# Altium PCB 主控转接板-V1.0.PcbDoc
Units mil, origin at the board's own origin, x right, y up, seen from the top; angles counter-clockwise.
Board outline 2559.06 x 1181.1 mil, 2 copper layers (Top Layer, Bottom Layer); 32 components, 18 nets, 128 pads, 52 vias.
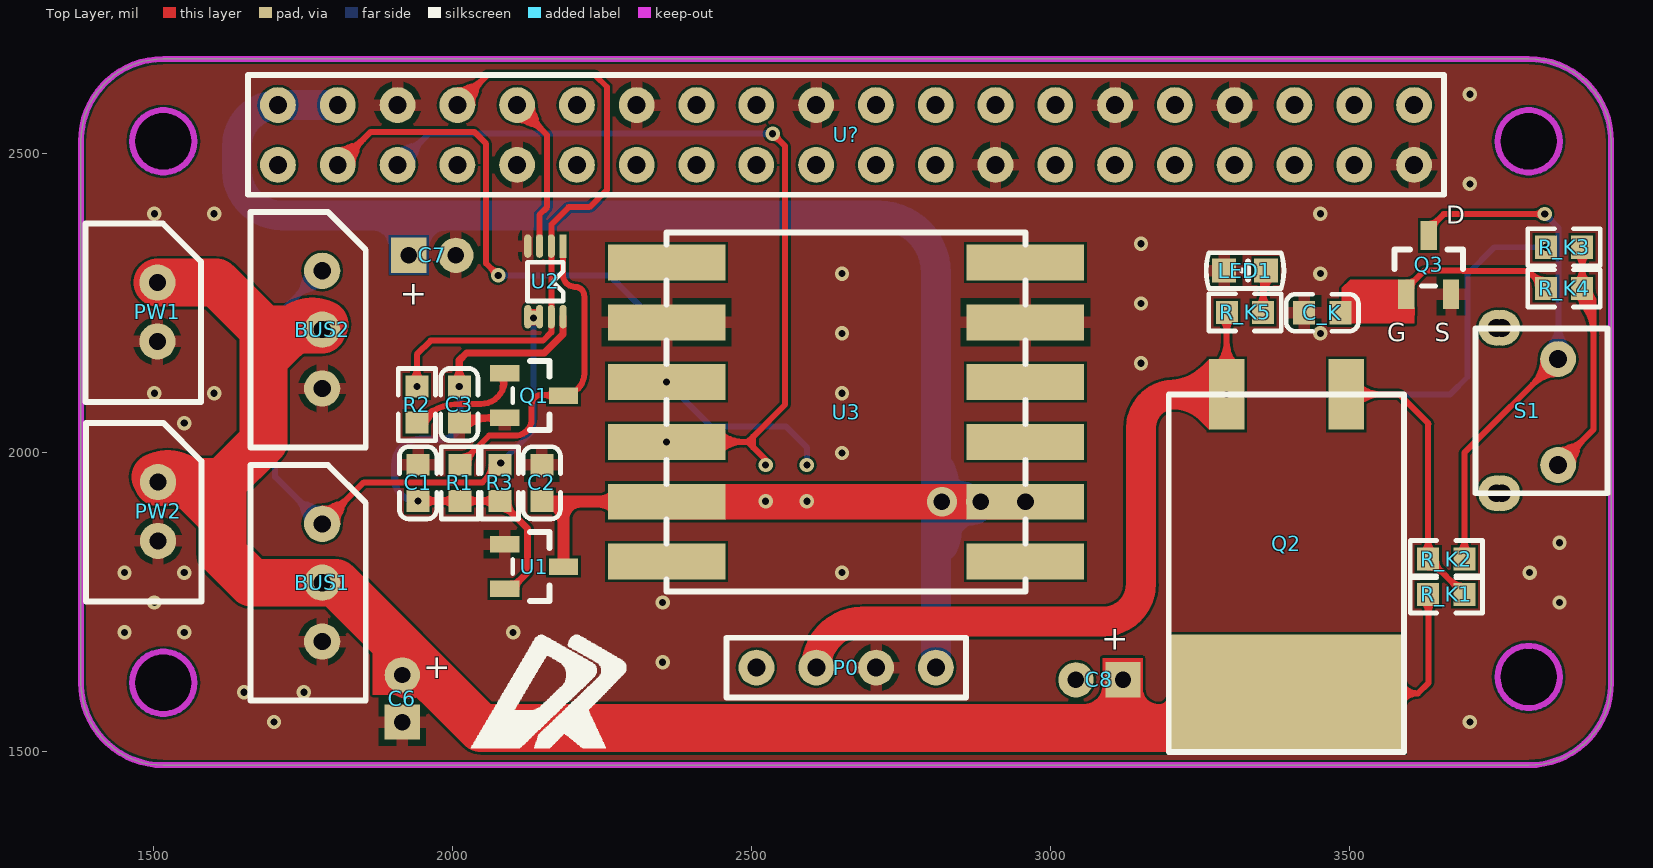
[diagram p0: Top Layer view]
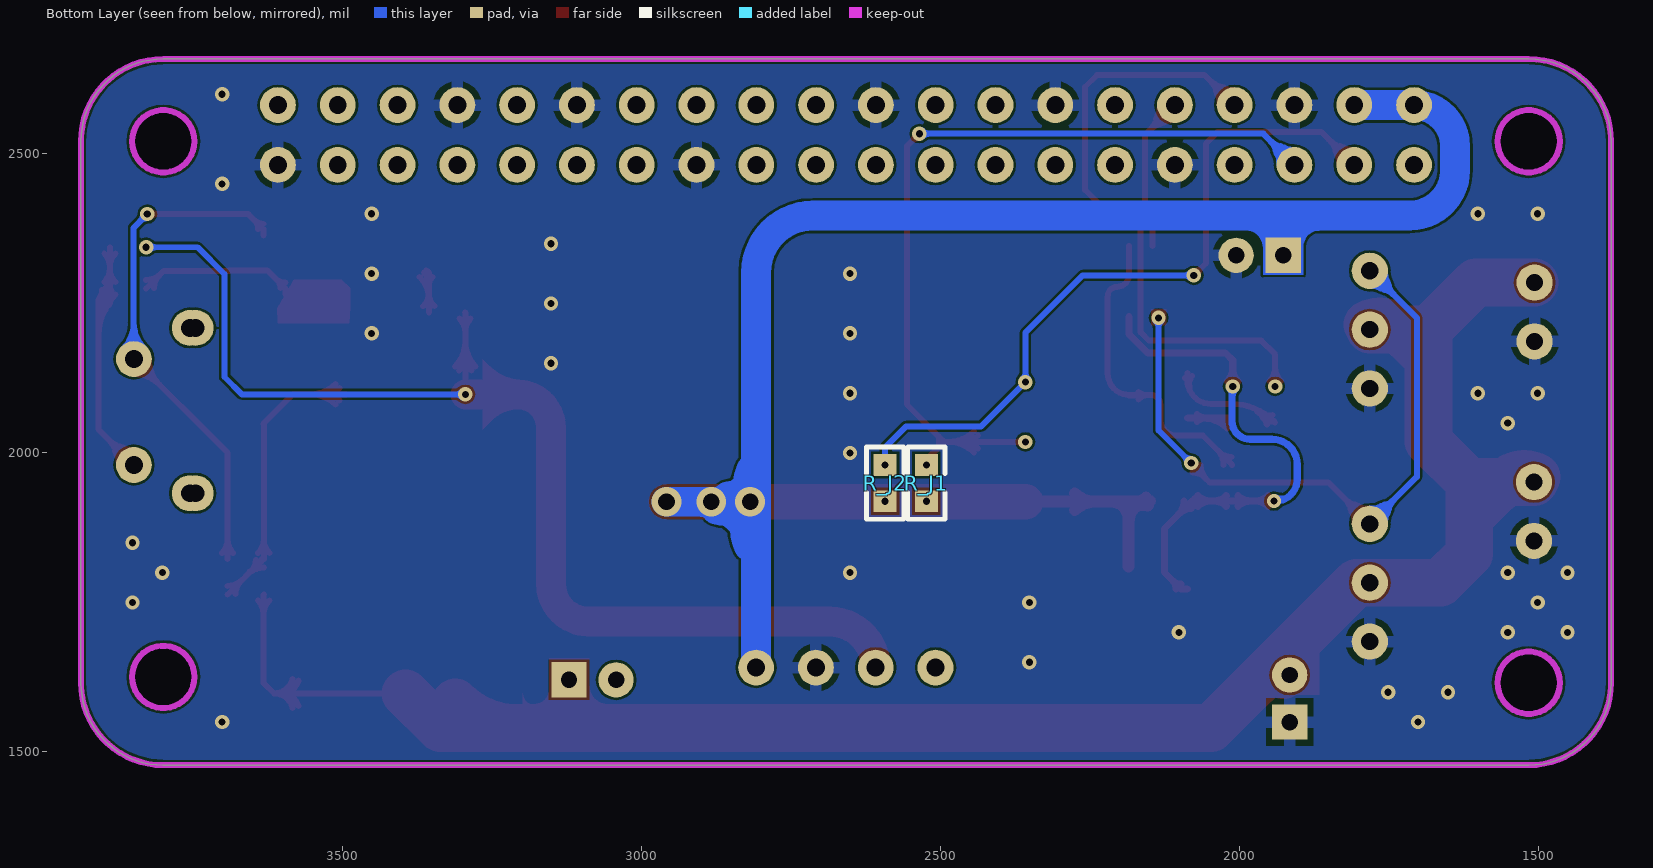
[diagram p1: Bottom Layer view, seen from below]
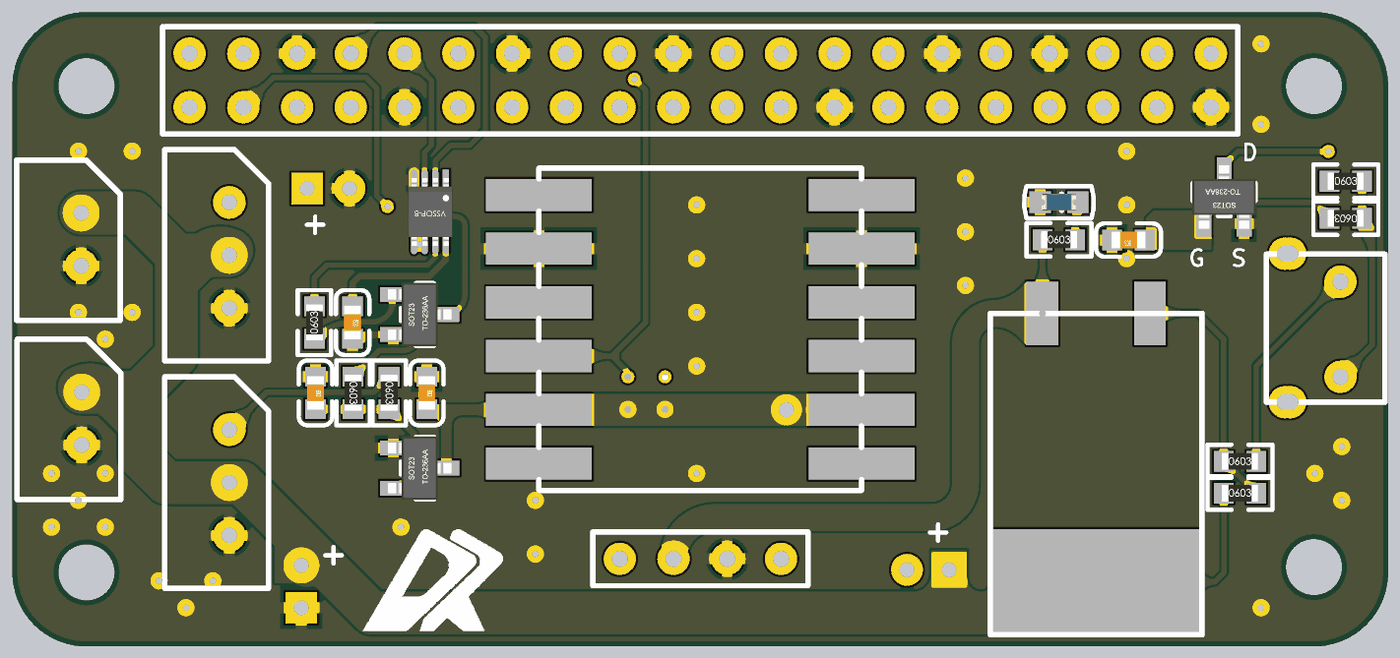
[diagram p2: 3D render of the assembled board from above, using the file's embedded part models]

## Layer stack, top to bottom
Top Solder: solder mask 0.4, Solder Resist, Dk 3.5
Top Layer: signal copper 1.4
Dielectric 1: dielectric 12.6, FR-4, Dk 4.8
Bottom Layer: signal copper 1.4
Bottom Solder: solder mask 0.4, Solder Resist, Dk 3.5

## Board outline
1377.95,1614.17 1377.95,2519.69 1377.95,2519.68 cw(c1515.75,2519.68) 1515.75,2657.48 3799.21,2657.48 cw(c3799.21,2519.68) 3937.01,2519.68 3937.01,1614.17 cw(c3799.21,1614.17) 3799.21,1476.38 1515.75,1476.38 cw(c1515.75,1614.17)
cut-out: 3747.05,2519.68 ccw(c3799.21,2519.68) 3799.21,2467.52 ccw(c3799.21,2519.68) 3851.38,2519.68 ccw(c3799.21,2519.68) 3799.21,2571.85 ccw(c3799.21,2519.68)
cut-out: 3747.05,1624.02 ccw(c3799.21,1624.02) 3799.21,1571.85 ccw(c3799.21,1624.02) 3851.38,1624.02 ccw(c3799.21,1624.02) 3799.21,1676.18 ccw(c3799.21,1624.02)
cut-out: 1515.75,1562.01 cw(c1515.75,1614.17) 1463.58,1614.17 cw(c1515.75,1614.17) 1515.75,1666.34 cw(c1515.75,1614.17) 1567.91,1614.17 cw(c1515.75,1614.17)
cut-out: 1515.75,2467.52 cw(c1515.75,2519.68) 1463.58,2519.68 cw(c1515.75,2519.68) 1515.75,2571.85 cw(c1515.75,2519.68) 1567.91,2519.68 cw(c1515.75,2519.68)

## Design rules (kind name [scope] priority, off if disabled: settings)
Clearance [All] p1: gap=4
HoleToHoleClearance [All] p1: gap=4 allowstackedmicrovias=TRUE
MinimumSolderMaskSliver [All] p1: minsoldermaskwidth=4
PolygonConnect PolygonConnect_1 [isvia] p1: connectstyle=Direct reliefconductorwidth=10 reliefentries=4 polygonreliefangle="90 Angle" airgapwidth=10
PolygonConnect [All] p2: connectstyle=Relief reliefconductorwidth=20 reliefentries=4 polygonreliefangle="90 Angle" airgapwidth=10
RoutingVias [All] p1: holewidth=28 width=50 viastyle="Through Hole" minholewidth=28 minwidth=50 maxholewidth=28 maxwidth=50
SilkToSilkClearance [All] p1: silktosilkclearance=0
SilkToSolderMaskClearance [IsPad] p1: minsilkscreentomaskgap=0 clearancetoexposedcopper=TRUE
SolderMaskExpansion [All] p1: expansion=4
Width [All] p1: maxlimit=100 minlimit=10 preferedwidth=50 minimp=50.000000 maximp=50.000000 favimp=50.000000
25 further rules are at their usual default settings.

## Classes and differential pairs
component class 主控转接板-V1.0: BUS1 BUS2 C1 C2 C3 C_K LED1 P0 PW1 PW2 Q1 Q2 Q3 R1 R2 R3 R_J1 R_J2 R_K1 R_K2 R_K3 R_K4 R_K5 S1 U1 U2 U3 U?

## Components (designator, comment, footprint, x,y, rotation, side; value= is the part's Value field where it differs from the comment)
BUS1 "Header 3" 3P 1781.5,1879.92 r270 top
BUS2 "Header 3" 3P 1781.5,2303.15 r270 top
C1 "C0603" Cap_0603 1941.79,1948.43 r270 top
C2 "C0603" Cap_0603 2148.79,1948.43 r270 top
C3 "C0603" Cap_0603 2010.79,2079.43 r270 top
C6 "Comment" "EC 5x11x2mm" 1915.43,1587.76 r90 top
C7 "Comment" "EC 5x11x2mm" 1965.63,2329 r0 top
C8 "Comment" "EC 5x11x2mm" 3081.37,1619 r180 top
C_K "4.7uF" Cap_0603 3454,2233 r180 top
LED1 "LED" LED_0603 3324.79,2303.43 r180 top
P0 "Header 4" MP2315GJ 2507.79,1639.43 r90 top
PW1 "Header_1X2" 2P 1505.91,2283.46 r270 top
PW2 "Header_1X2" 2P 1506.89,1949.8 r270 top
Q1 "S8050" LC-SOT-23(SOT-23-3) 2135.79,2094.43 r180 top
Q2 "IRF9540" SOT-263 3494.09,2096.46 r180 top
Q3 "2N7002" LC-SOT-23(SOT-23-3) 3631.89,2312.99 r270 top
R1 "0603" Res_0603 2011.79,1948.43 r270 top
R2 "0603" Res_0603 1939.79,2079.43 r90 top
R3 "0603" Res_0603 2078.79,1948.43 r270 top
R_J1 "1K" Res_0603 2523,1948 r90 bottom
R_J2 "1K" Res_0603 2592,1948 r90 bottom
R_K1 "51K" Res_0603 3661.42,1761.81 r0 top
R_K2 "" Res_0603 3661.42,1820.87 r0 top
R_K3 "510K" Res_0603 3858.27,2342.52 r0 top
R_K4 "510K" Res_0603 3858.27,2273.62 r180 top
R_K5 "1K" Res_0603 3324.79,2233.43 r0 top
S1 "SW-PB" "Touch Switch" 3848.43,2155.51 r270 top
U1 "XC6206P332MR (662K)" LC-SOT-23(SOT-23-3) 2135.79,1808.43 r180 top
U2 "SN74LVC2G126" VSSOP-8 2154.79,2285.43 r270 top
U3 "JY901" JY901 2957.48,1816.93 r180 top
U? "Raspberry Pi Zero W" "2.54 2*20PIN" 1707.48,2480.31 r90 top
? "Comment" LOGO2 2030,1505.36 r0 top

## Footprints (in the part's own frame and the unit in brackets; to place one, negate y for a bottom-side part, rotate by r counter-clockwise, add the part's x,y. Pads: shape width x height; smd on the part's side, far side on the other; paste and mask are expansions set on the pad)
"2.54 2*20PIN" [mil]
  round 60 hole 30: 1(0,0) 2(100,0) 3(0,-100) 4(100,-100) 5(0,-200) 6(100,-200) 7(0,-300) 8(100,-300) 9(0,-400) 10(100,-400) 11(0,-500) 12(100,-500) 13(0,-600) 14(100,-600) 15(0,-700) 16(100,-700) 17(0,-800) 18(100,-800) 19(0,-900) 20(100,-900) 21(0,-1000) 22(100,-1000) 23(0,-1100) 24(100,-1100) 25(0,-1200) 26(100,-1200) 27(0,-1300) 28(100,-1300) 29(0,-1400) 30(100,-1400) 31(0,-1500) 32(100,-1500) 33(0,-1600) 34(100,-1600) 35(0,-1700) 36(100,-1700) 37(0,-1800) 38(100,-1800) 39(0,-1900) 40(100,-1900)
  silkscreen extent -50,-1950 150,50
2P [mm]
  round 1.542 hole 0.73: 1(0,0) 2(2.5,0)
  silkscreen extent -2.5,-3.05 5.08,1.85
3P [mm]
  round 1.542 hole 0.73: 1(0,0) 2(2.5,0) 3(5,0)
  silkscreen extent -2.5,-3.05 7.5,1.85
Cap_0603 [mm]
  rect 0.93x0.98 smd: 1(-0.77,0) 2(0.77,0)
  silkscreen extent -1.53,-0.79 1.54,0.79, body extent -0.8,-0.4 0.8,0.4, height 0.3
"EC 5x11x2mm" [mm]
  rect 1.5x1.5 hole 0.7: 1(-1,0)
  round 1.5 hole 0.7: 2(1,0)
JY901 [mil]
  rect 196.85x60 smd: 1(0,0) 2(0,-100) 3(0,-200) 4(0,-300) 5(0,-400) 6(0,-500) 7(600,-500) 8(600,-400) 9(600,-300) 10(600,-200) 11(600,-100) 12(600,0)
  silkscreen extent 0,-550 600,50
LC-SOT-23(SOT-23-3) [mm]
  rect 1.25x0.7 smd: 1(1.25,-0.95) 2(1.25,0.95) 3(-1.25,0)
  silkscreen extent -0.65,-1.46 0.9,1.46, body extent -1.5,-1.5 1.5,1.5, height 1.3
LED_0603 [mil]
  rect 40x40 smd: A(-35,0) K(35,0)
  silkscreen extent -65,-30 65,30, body extent -32,-16 32,16, height 24
LOGO2 [mil]
  silkscreen extent 0,0 260,189
MP2315GJ [mil]
  round 60 hole 30: 1(0,-300) 2(0,-200) 3(0,-100) 4(0,0)
  silkscreen extent -50,-350 50,50
Res_0603 [mm]
  rect 0.93x0.98 smd: 1(-0.77,0) 2(0.77,0)
  silkscreen extent -1.53,-0.79 1.54,0.79, body extent -0.85,-0.4 0.85,0.4, height 0.56
SOT-263 [mm]
  rect 1.5x3 smd: 1(0,0) 3(5.08,0)
  rect 10x5 smd: 4(2.54,12.7)
  silkscreen extent -2.46,0 7.54,15.2
"Touch Switch" [mil]
  round 60 hole 30: 0(-52.17,-93.5) 0(-52.17,-103.35) 0(224.41,-103.35) 0(224.41,-93.5) 1(0,0) 2(177.17,0)
  silkscreen extent -51,-138 224,83
VSSOP-8 [mm]
  rect 1x0.3 smd: 1(-1.5,0.75)
  oval 1x0.3 smd: 2(-1.5,0.25) 3(-1.5,-0.25) 4(-1.5,-0.75) 5(1.5,-0.75) 6(1.5,-0.25) 7(1.5,0.25) 8(1.5,0.75)
  silkscreen extent -0.81,-0.76 0.84,0.76, body extent -1.6,-1.04 1.6,1.06, height 0.9

## Part data
BUS1 BUS2: "Header, 3-Pin"
C1 C2 C3: library part "Cap 1"
C_K: library part CAP_C, "Electrolytic Capacitor"
P0: "Header, 4-Pin"
Q1: library part NPN
Q2: library part MOSFET-P, "P-Channel MOSFET"
Q3: library part MOSFET-N, "N-Channel MOSFET"
R1 R2 R3: library part Res2
R_J1 R_J2 R_K1 R_K2 R_K3 R_K4 R_K5: library part RES, "Resistor"
S1: "Switch"

## Via types
v1: diameter 24, hole 12, Top Layer to Bottom Layer, 49 vias
v2: diameter 50, hole 28, Top Layer to Bottom Layer, 3 vias

## Nets (pads, with @x,y where several pads share a name; then routed paths per layer and width w, separated by ;. In a path a pad name is that pad's centre, name@x,y a point inside that pad or via, vN(x,y) a via of type N, cw(c..) or ccw(c..) an arc to the next point about the centre after c; other vN are vias at no path point)
3.3V: C1.2 C3.1 R1.2 R3.2 U1.2 U2.8 | length 1631.3
  Top Layer w12: v1(1941.79,1918.11) R1.2 R3.2 2124.79,1872.11 2124.79,1798.43 2097.39,1771.02 U1.2 ; v1(2010.79,2109.74) 2010.79,2153.43 2022.79,2165.43 2152.79,2165.43 2184.32,2196.95 U2.8 ; R3.2@2074.54,1913.87 ccw(c2064.3,1903.62) 2064.3,1918.11 ccw(c2064.3,1932.6) R3.2@2074.54,1922.35 ; R3.2@2079.77,1905.8 cw(c2079.77,1878.47) 2099.1,1897.8 ; R3.2@2092.08,1918.11 ccw(c2124.17,1918.11) 2101.48,1895.42 ; U1.2@2097.4,1778.8 ccw(c2097.4,1797.55) U1.2@2110.66,1784.29 ; U1.2@2105.18,1771.02 cw(c2124,1771.02) U1.2@2110.69,1784.33 ; C1.2@1956.27,1918.11 cw(c1956.27,1932.6) 1946.03,1922.35 ccw(c1956.27,1932.6) C1.2@1956.27,1918.11 ; C1.2@1956.27,1918.11 ccw(c1956.27,1903.62) 1946.03,1913.87 cw(c1956.27,1903.62) C1.2@1956.27,1918.11 ; 1972.48,1918.11 cw(c1972.48,1947.82) 1951.47,1926.81 ccw(c1972.48,1947.82) 1972.48,1918.11 ; 1972.48,1918.11 ccw(c1972.48,1888.4) 1951.47,1909.41 cw(c1972.48,1888.4) 1972.48,1918.11 ; 1981.09,1918.11 cw(c1981.09,1888.4) 2002.1,1909.41 ccw(c1981.09,1888.4) 1981.09,1918.11 ; 1981.09,1918.11 ccw(c1981.09,1947.82) 2002.1,1926.81 cw(c1981.09,1947.82) 1981.09,1918.11 ; C3.1@2010.79,2124.23 cw(c1996.3,2124.23) 2006.54,2113.98 ccw(c1996.3,2124.23) C3.1@2010.79,2124.23 ; C3.1@2010.79,2124.23 ccw(c2025.27,2124.23) 2015.03,2113.98 cw(c2025.27,2124.23) C3.1@2010.79,2124.23 ; 2010.79,2139.45 cw(c1981.08,2139.45) 2002.09,2118.44 ccw(c1981.08,2139.45) 2010.79,2139.45 ; 2010.79,2139.45 ccw(c2040.5,2139.45) 2019.49,2118.44 cw(c2040.5,2139.45) 2010.79,2139.45 ; 2042.48,1918.11 cw(c2042.48,1947.82) 2021.47,1926.81 ccw(c2042.48,1947.82) 2042.48,1918.11 ; 2042.48,1918.11 ccw(c2042.48,1888.4) 2021.47,1909.41 cw(c2042.48,1888.4) 2042.48,1918.11 ; 2048.09,1918.11 cw(c2048.09,1888.4) 2069.1,1909.41 ccw(c2048.09,1888.4) 2048.09,1918.11 ; 2048.09,1918.11 ccw(c2048.09,1947.82) 2069.1,1926.81 cw(c2048.09,1947.82) 2048.09,1918.11
  Bottom Layer w12: v1@1939.1,1918.11 cw(c1939.1,1954.43) 1902.79,1954.43 1902.79,1979.43 cw(c1944.79,1979.43) 1944.79,2021.43 1981.79,2021.43 ccw(c1981.79,2051.43) 2011.79,2051.43 v1@2011.79,2108.74 ; 1926,1921.62 ccw(c1930.36,1937.91) 1938.79,1923.31 cw(c1930.36,1937.91) 1926,1921.62 ; 1929.24,1920.75 cw(c1926.1,1909.05) 1936.59,1915.11 ccw(c1926.1,1909.05) 1929.24,1920.75 ; v1@2006.54,2105.5 cw(c1993.89,2092.84) 2011.79,2092.84 ccw(c1993.89,2092.84) v1@2006.54,2105.5 ; 2011.79,2097.67 cw(c2022.86,2097.67) 2015.03,2105.5 ccw(c2022.86,2097.67) 2011.79,2097.67
  Bottom Layer w20: v1@1939.1,1918.11 v1(1941.79,1918.11) ; v1(2010.79,2109.74) cw(c2010.79,2108.74) v1@2011.79,2108.74
5.0V: C2.2 C7.1 P0.1 R_J1.1 R_J2.1 U1.3 U3.2 U3.11 U?.2 U?.4 | length 4094.5
  Top Layer w20: C2.2 cw(c2148.79,1881.9) C2.2@2157.96,1916.93 ; C2.2@2149.97,1916.93 C2.2@2157.96,1916.93 ; 2171,1915.72 2169.79,1916.93 ; U1.3 2185,1881.9 ; U3.11 2213.79,1916.93 ; C2.2@2156.2,1923.37 ccw(c2169.79,1934.48) 2169.79,1916.93 ; C2.2@2156.2,1923.37 ccw(c2169.79,1934.48) 2169.79,1916.93 ; C2.2@2156.2,1923.37 ccw(c2169.79,1934.48) 2169.79,1916.93 ; C2.2@2156.2,1923.37 ccw(c2169.79,1934.48) 2169.79,1916.93 ; C2.2@2157.96,1916.93 cw(c2148.79,1881.9) 2185,1881.9 ; C2.2@2157.96,1916.93 2169.79,1916.93 ; 2169.79,1916.93 2213.79,1916.93 ; 2185,1881.9 2185,1888.14 cw(c2213.79,1888.14) 2213.79,1916.93 ; 2240.77,1916.93 cw(c2240.77,1868.64) 2274.91,1902.79 ccw(c2240.77,1868.64) 2240.77,1916.93 ; 2240.77,1916.93 ccw(c2240.77,1965.21) 2274.91,1931.07 cw(c2240.77,1965.21) 2240.77,1916.93 ; C2.2@2152.57,1910.29 cw(c2160.73,1887.55) 2172.69,1908.54 ccw(c2160.73,1887.55) C2.2@2152.57,1910.29 ; C2.2@2155.65,1923.98 ccw(c2172.68,1941.02) 2172.68,1916.93 cw(c2172.68,1941.02) C2.2@2155.65,1923.98
  Top Layer w60: U3.11 v2(2957.48,1916.93)
  Bottom Layer w50: U?.4 U?.2 ccw(c1707.48,2511.62) 1638.79,2511.62 1638.79,2471.43 ccw(c1714.79,2471.43) 1714.79,2395.43 2712.79,2395.43 cw(c2712.79,2300.43) 2807.79,2300.43 2807.79,1987.43 ; P0.1 2807.79,1816.93 ; 2807.79,1892.79 cw(c2841.93,1892.79) v2(2817.79,1916.93) ; 2807.79,1941.07 ccw(c2841.93,1941.07) v2(2817.79,1916.93) ; 2815.44,1971.02 cw(c2751.32,1941.13) v2(2817.79,1916.93) ; 2819.46,1842.53 ccw(c2741.67,1878) v2(2817.79,1916.93) ; 2855.12,1925.37 ccw(c2843.01,1892.12) v2(2817.79,1916.93) ; v2@2873.81,1904.23 cw(c2855.48,1953.3) v2(2817.79,1916.93) ; v2(2957.48,1916.93) 2907.79,1916.93 ; 2807.79,1816.93 cw(c2907.79,1816.93) 2907.79,1916.93 ; 2807.79,1816.93 2807.79,1987.43 ; 2807.79,1987.43 ccw(c2878.28,1987.43) 2878.28,1916.93 2907.79,1916.93
  other v1: 2523,1917.69 2592,1917.69
  other v2: 2882.79,1916.93
BUS: BUS1.1 BUS2.1 R3.1 U2.5 U2.6 | length 2551.2
  Top Layer w10: BUS1.1@1776.94,1880.85 cw(c1816.67,1872.72) 1806.18,1911.89 ; BUS1.1 1851,1949.43 2049.47,1949.43 R3.1 cw(c2082.86,1978.74) v1(2079.98,1981.61) ; BUS1.1@1782.43,1875.37 ccw(c1774.29,1915.1) 1813.46,1904.6 ; 1807.71,1906.13 cw(c1781.5,1932.34) 1781.5,1895.28 ccw(c1781.5,1932.34) 1807.71,1906.13 ; 1807.71,1906.13 ccw(c1833.92,1879.92) 1796.85,1879.92 cw(c1833.92,1879.92) 1807.71,1906.13 ; 1824.78,1923.2 cw(c1781.5,1966.49) 1781.5,1905.28 ccw(c1781.5,1966.49) 1824.78,1923.2 ; 1824.78,1923.2 ccw(c1868.06,1879.92) 1806.85,1879.92 cw(c1868.06,1879.92) 1824.78,1923.2 ; 2054.39,1954.34 ccw(c2029.99,1978.74) 2064.5,1978.74 cw(c2029.99,1978.74) 2054.39,1954.34 ; 2056.77,1956.72 cw(c2077.8,1935.68) 2077.8,1965.43 ccw(c2077.8,1935.68) 2056.77,1956.72 ; R3.1@2066.83,1966.79 ccw(c2052.01,1981.61) 2072.98,1981.61 cw(c2052.01,1981.61) R3.1@2066.83,1966.79 ; R3.1@2070.9,1970.86 cw(c2079.98,1961.78) 2079.98,1974.61 ccw(c2079.98,1961.78) R3.1@2070.9,1970.86
  Bottom Layer w10: 1749.53,1904.6 ccw(c1788.7,1915.1) BUS1.1@1780.56,1875.37 ; 1749.53,2278.47 cw(c1788.7,2267.97) BUS2.1@1780.56,2307.7 ; 1756.81,1911.89 cw(c1746.32,1872.72) BUS1.1@1786.05,1880.85 ; 1756.81,2271.18 ccw(c1746.32,2310.35) BUS2.1@1786.05,2302.22 ; BUS1.1 1702.76,1958.66 1702.76,2224.41 BUS2.1 ; v1(2079.98,1981.61) 2134.79,2036.43 v1(2134.79,2224.43) ; 1738.21,1923.2 cw(c1694.93,1879.92) 1756.14,1879.92 ccw(c1694.93,1879.92) 1738.21,1923.2 ; 1738.21,1923.2 ccw(c1781.5,1966.49) 1781.5,1905.28 cw(c1781.5,1966.49) 1738.21,1923.2 ; 1738.21,2259.87 cw(c1781.5,2216.58) 1781.5,2277.8 ccw(c1781.5,2216.58) 1738.21,2259.87 ; 1738.21,2259.87 ccw(c1694.93,2303.15) 1756.14,2303.15 cw(c1694.93,2303.15) 1738.21,2259.87 ; 1755.28,1906.13 cw(c1729.07,1879.92) 1766.14,1879.92 ccw(c1729.07,1879.92) 1755.28,1906.13 ; 1755.28,1906.13 ccw(c1781.5,1932.34) 1781.5,1895.28 cw(c1781.5,1932.34) 1755.28,1906.13 ; 1755.28,2276.94 cw(c1781.5,2250.73) 1781.5,2287.8 ccw(c1781.5,2250.73) 1755.28,2276.94 ; 1755.28,2276.94 ccw(c1729.07,2303.15) 1766.14,2303.15 cw(c1729.07,2303.15) 1755.28,2276.94 ; 2091.93,1993.56 cw(c2079.98,2005.51) 2079.98,1988.61 ccw(c2079.98,2005.51) 2091.93,1993.56 ; 2091.93,1993.56 ccw(c2103.88,1981.61) 2086.98,1981.61 cw(c2103.88,1981.61) 2091.93,1993.56 ; 2134.79,2207.53 cw(c2151.69,2207.53) 2139.74,2219.48 ccw(c2151.69,2207.53) 2134.79,2207.53 ; 2134.79,2207.53 ccw(c2117.89,2207.53) 2129.84,2219.48 cw(c2117.89,2207.53) 2134.79,2207.53
EN: P0.4
GND: BUS1.3 BUS2.3 C1.1 C2.1 C3.2 C6.1 C7.2 C_K.2 LED1.K P0.2 PW1.2 PW2.2 Q1.2 Q3.2 U1.1 U2.4 U3.5 U3.8 U?.6 U?.9 U?.14 U?.20 U?.25 U?.30 U?.34 U?.39 | length 163.7
  Top Layer w12: C3.2@2011.99,2048.89 cw(c2031.62,2029.26) 2031.62,2057.02 ; C3.2@2018.7,2057.02 Q1.2 ; C3.2@2020.47,2040.41 cw(c2060.59,2000.29) 2060.59,2057.02 ; Q1.2@2070.25,2051.52 ccw(c2056.97,2038.24) 2056.97,2057.02 ccw(c2056.97,2075.8) Q1.2@2070.25,2062.52
  other v1: 1700.79,1548.43 3700.79,1548.43 1650.79,1598.43 1750.79,1598.43 2350.79,1648.43 1450.79,1698.43 1550.79,1698.43 2100.79,1698.43 1500.79,1748.43 2350.79,1748.43 3850.79,1748.43 1450.79,1798.43 1550.79,1798.43 2650.79,1798.43 3800.79,1798.43 3850.79,1848.43 2650.79,1998.43 1550.79,2048.43 1500.79,2098.43 1600.79,2098.43 2650.79,2098.43 3150.79,2148.43 2650.79,2198.43 3450.79,2198.43 3150.79,2248.43 2650.79,2298.43 3450.79,2298.43 3150.79,2348.43 1500.79,2398.43 1600.79,2398.43 3450.79,2398.43 3700.79,2448.43 3700.79,2598.43
I2C_SCL: R_J1.2 U3.10 U?.5 | length 2257.4
  Top Layer w10: v1(2357.48,2016.93) 2493.29,2016.93 ; v1(2523,1978.32) 2523,1987.22 2502.22,2008 ; v1(2534.79,2532.43) 2555.79,2511.43 2555.79,2079.43 2502.22,2025.86 ; U3.10@2374.38,2016.93 cw(c2374.38,2033.83) 2362.43,2021.88 ccw(c2374.38,2033.83) U3.10@2374.38,2016.93 ; U3.10@2374.38,2016.93 ccw(c2374.38,2000.03) 2362.43,2011.98 cw(c2374.38,2000.03) U3.10@2374.38,2016.93 ; 2462.12,2016.93 cw(c2462.12,2053.14) 2436.51,2027.54 ccw(c2462.12,2053.14) 2462.12,2016.93 ; 2462.12,2016.93 ccw(c2462.12,1980.72) 2436.51,2006.32 cw(c2462.12,1980.72) 2462.12,2016.93 ; 2486.26,2016.93 cw(c2486.26,2077.28) 2443.58,2034.61 ccw(c2486.26,2077.28) 2486.26,2016.93 ; 2486.26,2016.93 ccw(c2486.26,1956.57) 2443.58,1999.25 cw(c2486.26,1956.57) 2486.26,2016.93 ; 2493.29,2016.93 2502.22,2008 ; 2493.29,2016.93 2502.22,2025.86 ; 2502.22,2008 2502.22,2025.86 ; 2546.74,2520.48 cw(c2558.69,2532.43) 2541.79,2532.43 ccw(c2558.69,2532.43) 2546.74,2520.48 ; 2546.74,2520.48 ccw(c2534.79,2508.53) 2534.79,2525.43 cw(c2534.79,2508.53) 2546.74,2520.48
  Bottom Layer w10: U?.5@1902.58,2481.32 cw(c1941.42,2473.36) 1931.16,2511.66 ; U?.5 1959.59,2532.43 v1(2534.79,2532.43) ; U?.5@1908.48,2475.42 ccw(c1900.53,2514.26) 1938.83,2504 ; 1933.09,2505.92 cw(c1907.48,2531.53) 1907.48,2495.31 ccw(c1907.48,2531.53) 1933.09,2505.92 ; 1933.09,2505.92 ccw(c1958.69,2480.31) 1922.48,2480.31 cw(c1958.69,2480.31) 1933.09,2505.92 ; 1950.16,2522.99 cw(c1907.48,2565.67) 1907.48,2505.31 ccw(c1907.48,2565.67) 1950.16,2522.99 ; 1950.16,2522.99 ccw(c1992.84,2480.31) 1932.48,2480.31 cw(c1992.84,2480.31) 1950.16,2522.99 ; 2517.89,2532.43 cw(c2517.89,2515.53) 2529.84,2527.48 ccw(c2517.89,2515.53) 2517.89,2532.43 ; 2517.89,2532.43 ccw(c2517.89,2549.32) 2529.84,2537.37 cw(c2517.89,2549.32) 2517.89,2532.43
I2C_SDA: R_J2.2 U3.9 U?.3 | length 1771.6
  Top Layer w10: U?.3@1802.58,2481.32 cw(c1841.42,2473.36) 1831.16,2511.66 ; U?.3 1862.59,2535.43 2035.79,2535.43 2055.79,2515.43 2055.79,2315.43 v1(2075.79,2295.43) ; U?.3@1808.48,2475.42 ccw(c1800.53,2514.26) 1838.83,2504 ; 1833.09,2505.92 cw(c1807.48,2531.53) 1807.48,2495.31 ccw(c1807.48,2531.53) 1833.09,2505.92 ; 1833.09,2505.92 ccw(c1858.69,2480.31) 1822.48,2480.31 cw(c1858.69,2480.31) 1833.09,2505.92 ; 1850.16,2522.99 cw(c1807.48,2565.67) 1807.48,2505.31 ccw(c1807.48,2565.67) 1850.16,2522.99 ; 1850.16,2522.99 ccw(c1892.84,2480.31) 1832.48,2480.31 cw(c1892.84,2480.31) 1850.16,2522.99 ; 2063.84,2307.37 cw(c2051.89,2295.43) 2068.79,2295.43 ccw(c2051.89,2295.43) 2063.84,2307.37 ; 2063.84,2307.37 ccw(c2075.79,2319.32) 2075.79,2302.43 cw(c2075.79,2319.32) 2063.84,2307.37
  Bottom Layer w10: v1(2075.79,2295.43) 2261.79,2295.43 2357.48,2199.73 v1(2357.48,2116.93) 2431.41,2043 2557,2043 2592,2008 v1(2592,1978.32) ; 2092.69,2295.43 cw(c2092.69,2312.32) 2080.74,2300.37 ccw(c2092.69,2312.32) 2092.69,2295.43 ; 2092.69,2295.43 ccw(c2092.69,2278.53) 2080.74,2290.48 cw(c2092.69,2278.53) 2092.69,2295.43 ; 2357.48,2133.83 cw(c2340.58,2133.83) 2352.53,2121.88 ccw(c2340.58,2133.83) 2357.48,2133.83 ; 2357.48,2133.83 ccw(c2374.38,2133.83) 2362.43,2121.88 cw(c2374.38,2133.83) 2357.48,2133.83
NetC_K_1: C_K.1 Q3.1 R_K4.2 | length 435.2
  Top Layer w10: Q3.1 3594.49,2273.13 3624.75,2303.39 3689.28,2303.39 3689.52,2303.15 3798.43,2303.15 R_K4.2 ; Q3.1@3594.49,2283.39 ccw(c3594.49,2308.15) 3612,2290.64 cw(c3594.49,2308.15) Q3.1@3594.49,2283.39 ; Q3.1@3603.27,2274.61 cw(c3620.89,2274.61) 3608.43,2287.07 ccw(c3620.89,2274.61) Q3.1@3603.27,2274.61 ; 3803.56,2298.02 ccw(c3827.95,2322.42) 3827.95,2287.91 cw(c3827.95,2322.42) 3803.56,2298.02 ; 3805.93,2295.64 cw(c3784.9,2274.61) 3814.65,2274.61 ccw(c3784.9,2274.61) 3805.93,2295.64
NetLED1_A: LED1.A R_K5.2 | length 331.5
  Top Layer w10: R_K5.2 3355.1,2298.74 cw(c3359.79,2298.74) LED1.A ; 3355.1,2266.54 cw(c3322.98,2266.54) 3345.69,2243.82 ccw(c3322.98,2266.54) 3355.1,2266.54 ; 3355.1,2266.54 ccw(c3387.23,2266.54) 3364.51,2243.82 cw(c3387.23,2266.54) 3355.1,2266.54 ; LED1.A@3349.18,2292.82 cw(c3334.88,2278.52) 3355.1,2278.52 ccw(c3334.88,2278.52) LED1.A@3349.18,2292.82 ; 3355.1,2255.9 cw(c3407.31,2255.9) 3370.39,2292.82 ccw(c3407.31,2255.9) 3355.1,2255.9 ; 3355.1,2280.04 cw(c3383.17,2280.04) 3363.32,2299.89 ccw(c3383.17,2280.04) 3355.1,2280.04
NetQ1_1: Q1.1 R2.1 | length 375.1
  Top Layer w10: R2.1 1941.81,2051.14 cw(c2012.52,1980.43) 2012.52,2080.43 2046.79,2080.43 ccw(c2046.79,2120.21) 2086.57,2120.21 Q1.1 ; R2.1@1942.05,2052.16 ccw(c1947.93,2066.14) 1961.07,2058.56 ; R2.1@1944.22,2061.96 ccw(c1951.44,2088.93) 1965.4,2064.75 cw(c1951.44,2088.93) R2.1@1944.22,2061.96 ; R2.1@1953.63,2045.67 cw(c1988.72,2036.26) 1970.56,2067.73 ccw(c1988.72,2036.26) R2.1@1953.63,2045.67 ; Q1.1@2079.19,2127.07 cw(c2056.37,2112.37) 2082.59,2105.35 ccw(c2056.37,2112.37) Q1.1@2079.19,2127.07 ; 2085.87,2117.58 cw(c2096.43,2114.76) 2090.96,2124.22 ccw(c2096.43,2114.76) 2085.87,2117.58
NetQ2_2: Q2.1 R_K1.2 R_K2.1 | length 1098.4
  Top Layer w10: Q2.1 3582.68,2096.46 3631.89,2047.24 ; 3631.1,2046.46 R_K2.1 3632.68,1820.87 R_K1.2 ; R_K2.1@3634.29,1820.75 ccw(c3662.52,1828.44) 3654.95,1800.19 ; 3529.17,2096.46 cw(c3529.17,2131.53) 3504.37,2106.73 ccw(c3529.17,2131.53) 3529.17,2096.46 ; 3529.17,2096.46 ccw(c3529.17,2061.38) 3504.37,2086.18 cw(c3529.17,2061.38) 3529.17,2096.46 ; 3553.31,2096.46 cw(c3553.31,2155.67) 3511.44,2113.8 ccw(c3553.31,2155.67) 3553.31,2096.46 ; 3553.31,2096.46 ccw(c3553.31,2037.24) 3511.44,2079.11 cw(c3553.31,2037.24) 3553.31,2096.46 ; 3631.1,1853.98 cw(c3598.98,1853.98) 3621.69,1831.26 ccw(c3598.98,1853.98) 3631.1,1853.98 ; 3631.1,1853.98 ccw(c3663.23,1853.98) 3640.51,1831.26 cw(c3663.23,1853.98) 3631.1,1853.98 ; R_K2.1@3631.1,1806.57 cw(c3631.1,1768.27) 3658.19,1795.36 ccw(c3631.1,1768.27) R_K2.1@3631.1,1806.57 ; R_K2.1@3644.41,1819.88 ccw(c3670.36,1819.88) 3652.01,1801.53 cw(c3670.36,1819.88) R_K2.1@3644.41,1819.88 ; 3667.34,1786.21 ccw(c3691.73,1810.6) 3691.73,1776.1 cw(c3691.73,1810.6) 3667.34,1786.21 ; 3669.71,1783.83 cw(c3648.68,1762.8) 3678.43,1762.8 ccw(c3648.68,1762.8) 3669.71,1783.83
NetQ3_3: Q3.3 R_K2.2 S1.1 | length 1307.2
  Top Layer w10: Q3.3 3631.89,2372.89 3657,2398 v1(3826,2398) ; Q3.3@3631.89,2381.81 ccw(c3631.89,2403.35) 3647.12,2388.12 ; Q3.3@3640.67,2373.03 cw(c3661.52,2373.03) 3646.78,2387.78 ; R_K2.2@3682.32,1831.26 ccw(c3659.61,1853.98) 3691.73,1853.98 ccw(c3723.86,1853.98) R_K2.2@3701.14,1831.26 ; R_K2.2 3691.73,1998.82 S1.1 ; v1@3821.05,2393.05 ccw(c3809.1,2381.1) 3809.1,2398 ccw(c3809.1,2414.9) v1@3821.05,2402.95 ; S1.1@3823.43,2155.51 cw(c3763.07,2155.51) 3805.75,2112.83 cw(c3848.43,2070.16) S1.1@3848.43,2130.51 ; S1.1@3833.43,2155.51 cw(c3797.21,2155.51) 3822.82,2129.91 cw(c3848.43,2104.3) S1.1@3848.43,2140.51
  Bottom Layer w10: v1@3826,2391 cw(c3826,2374.1) 3837.95,2386.05 cw(c3849.9,2398) v1@3833,2398 ; v1(3826,2398) 3848.95,2375.05 3848.95,2156.04 S1.1 ; S1.1@3830.75,2173.19 ccw(c3786.8,2217.14) 3848.95,2217.14 ; S1.1@3837.82,2166.12 ccw(c3810.94,2193) 3848.95,2193 ; 3848.95,2190.45 ccw(c3883.36,2190.45) S1.1@3859.03,2166.12 ; 3848.95,2214.59 ccw(c3907.51,2214.59) S1.1@3866.1,2173.19
NetR_K3_2: R_K3.2 R_K4.1 S1.2 | length 1509.6
  Top Layer w10: S1.2@3843.53,1979.35 cw(c3882.37,1971.4) 3872.11,2009.69 ; S1.2 3907.48,2037.4 3907.48,2254.72 R_K4.1 R_K3.2 ; S1.2@3849.43,1973.45 ccw(c3841.47,2012.29) 3879.77,2002.03 ; R_K4.1@3885.14,2259.78 cw(c3879.65,2239.29) 3898.02,2249.9 ; 3890.5,2245.43 cw(c3909.47,2257.51) R_K4.1@3891.26,2270.7 ; 3898.41,2233.02 cw(c3922.28,2248.23) R_K4.1@3899.36,2264.83 ; R_K4.1@3901.19,2268.39 ccw(c3934.75,2257.1) 3904.09,2239.4 ; 3874.03,2003.95 cw(c3848.43,2029.56) 3848.43,1993.35 ccw(c3848.43,2029.56) 3874.03,2003.95 ; 3874.03,2003.95 ccw(c3899.64,1978.35) 3863.43,1978.35 cw(c3899.64,1978.35) 3874.03,2003.95 ; 3888.58,2306.73 cw(c3856.46,2306.73) 3879.17,2284.02 ccw(c3856.46,2306.73) 3888.58,2306.73 ; 3888.58,2306.73 ccw(c3920.71,2306.73) 3897.99,2284.02 cw(c3920.71,2306.73) 3888.58,2306.73 ; 3888.58,2309.41 cw(c3920.71,2309.41) 3897.99,2332.13 ccw(c3920.71,2309.41) 3888.58,2309.41 ; 3888.58,2309.41 ccw(c3856.46,2309.41) 3879.17,2332.13 cw(c3856.46,2309.41) 3888.58,2309.41 ; 3891.1,2021.02 cw(c3848.43,2063.7) 3848.43,2003.35 ccw(c3848.43,2063.7) 3891.1,2021.02 ; 3891.1,2021.02 ccw(c3933.78,1978.35) 3873.43,1978.35 cw(c3933.78,1978.35) 3891.1,2021.02 ; 3907.48,2254.73 cw(c3921.52,2268.77) 3901.8,2271.08 ccw(c3921.52,2268.77) 3907.48,2254.73 ; 3907.48,2254.73 ccw(c3894.83,2242.08) 3891.25,2259.6 cw(c3894.83,2242.08) 3907.48,2254.73 ; R_K4.1@3879.17,2263.23 cw(c3810.83,2194.89) 3907.48,2194.89 ccw(c3810.83,2194.89) R_K4.1@3879.17,2263.23 ; R_K4.1@3886.24,2270.3 cw(c3834.98,2219.03) 3907.48,2219.03 ccw(c3834.98,2219.03) R_K4.1@3886.24,2270.3 ; R_K4.1@3893.32,2277.37 cw(c3859.12,2243.17) 3907.48,2243.17 ccw(c3859.12,2243.17) R_K4.1@3893.32,2277.37
RX: U2.3 U?.10 | length 653.2
  Top Layer w10: U?.10@2102.58,2579.31 ccw(c2141.42,2587.27) 2131.16,2548.97 ; U?.10 2157.79,2530.01 2157.79,2409.43 2144.95,2396.58 U2.3 ; U?.10@2108.48,2585.21 cw(c2100.53,2546.37) 2138.83,2556.63 ; 2133.09,2554.71 cw(c2158.69,2580.31) 2122.48,2580.31 ccw(c2158.69,2580.31) 2133.09,2554.71 ; 2133.09,2554.71 ccw(c2107.48,2529.1) 2107.48,2565.31 cw(c2107.48,2529.1) 2133.09,2554.71 ; 2150.16,2537.64 cw(c2192.84,2580.31) 2132.48,2580.31 ccw(c2192.84,2580.31) 2150.16,2537.64 ; 2150.16,2537.64 ccw(c2107.48,2494.96) 2107.48,2555.31 cw(c2107.48,2494.96) 2150.16,2537.64
TX: R2.2 U2.2 U2.7 U?.8 | length 1587.6
  Top Layer w10: v1(1939.79,2109.74) 1939.79,2163.43 1962.79,2186.43 2150.79,2186.43 2164.63,2200.27 U2.7 U2.2 2164.63,2380.27 2193.79,2409.43 2228.79,2409.43 2257.79,2438.43 2257.79,2610.43 2237.79,2630.43 2057.59,2630.43 U?.8 ; U?.8@2002.58,2581.32 cw(c2041.42,2573.36) 2031.16,2611.66 ; U?.8@2008.48,2575.42 ccw(c2000.53,2614.26) 2038.83,2604 ; R2.2@1939.79,2126.64 cw(c1922.89,2126.64) 1934.84,2114.69 ccw(c1922.89,2126.64) R2.2@1939.79,2126.64 ; R2.2@1939.79,2126.64 ccw(c1956.69,2126.64) 1944.74,2114.69 cw(c1956.69,2126.64) R2.2@1939.79,2126.64 ; 1939.79,2141.87 cw(c1907.66,2141.87) 1930.38,2119.15 ccw(c1907.66,2141.87) 1939.79,2141.87 ; 1939.79,2141.87 ccw(c1971.91,2141.87) 1949.2,2119.15 cw(c1971.91,2141.87) 1939.79,2141.87 ; 2033.09,2605.92 cw(c2007.48,2631.53) 2007.48,2595.31 ccw(c2007.48,2631.53) 2033.09,2605.92 ; 2033.09,2605.92 ccw(c2058.69,2580.31) 2022.48,2580.31 cw(c2058.69,2580.31) 2033.09,2605.92 ; 2050.16,2622.99 cw(c2007.48,2665.67) 2007.48,2605.31 ccw(c2007.48,2665.67) 2050.16,2622.99 ; 2050.16,2622.99 ccw(c2092.84,2580.31) 2032.48,2580.31 cw(c2092.84,2580.31) 2050.16,2622.99
TX1: Q1.3 R1.1 U2.1 | length 717.5
  Top Layer w10: R1.1 2060.47,2027.43 2103.79,2027.43 ccw(c2103.79,2055.43) 2131.79,2055.43 2131.79,2079.43 cw(c2147.79,2079.43) 2147.79,2095.43 Q1.3@2184,2095.43 ; Q1.3@2167.79,2094.43 Q1.3 ccw(c2184,2094.43) Q1.3@2184,2095.43 ; U2.1 2184.32,2295.9 ccw(c2203.79,2295.9) 2203.79,2276.43 cw(c2203.79,2260.43) 2219.79,2260.43 2219.79,2131.21 cw(c2184,2131.21) Q1.3@2184,2095.43 ; R1.1@2012.77,1992.05 ccw(c2012.77,2021.8) 2033.81,2000.76 cw(c2012.77,2021.8) R1.1@2012.77,1992.05 ; R1.1@2026.08,1978.74 cw(c2060.58,1978.74) 2036.18,2003.14 ccw(c2060.58,1978.74) R1.1@2026.08,1978.74 ; 2150.56,2095.43 cw(c2150.56,2070.82) 2167.97,2088.22 ccw(c2150.56,2070.82) 2150.56,2095.43 ; 2155.39,2095.43 ccw(c2155.39,2113.21) 2167.97,2100.63 cw(c2155.39,2113.21) 2155.39,2095.43
VCC_IN: BUS1.2 BUS2.2 C6.2 C8.1 PW1.1 PW2.1 Q2.4 R_K1.1 | length 4328.3
  Top Layer w10: Q2.4 3614.17,1596.46 ; R_K1.1 3631.89,1761.02 3631.89,1614.17 3614.17,1596.46 ; 3601.15,1596.46 cw(c3601.15,1625.47) 3573.12,1617.98 ccw(c3601.15,1625.47) 3601.15,1596.46 ; 3601.15,1596.46 ccw(c3601.15,1567.44) 3573.12,1574.93 cw(c3601.15,1567.44) 3601.15,1596.46 ; 3614.17,1596.46 cw(c3614.17,1628.95) 3582.78,1620.56 ccw(c3614.17,1628.95) 3614.17,1596.46 ; 3614.17,1596.46 ccw(c3614.17,1563.97) 3582.78,1572.35 cw(c3614.17,1563.97) 3614.17,1596.46 ; R_K1.1@3621.69,1751.42 cw(c3597.08,1726.8) 3631.89,1726.8 ccw(c3597.08,1726.8) R_K1.1@3621.69,1751.42 ; 3631.89,1730.6 cw(c3661.33,1730.6) 3640.51,1751.42 ccw(c3661.33,1730.6) 3631.89,1730.6
  Top Layer w80: PW2.1@1502.62,1958.45 cw(c1522.84,1917.53) 1555.12,1949.8 ; PW1.1 1604.33,2283.46 1683.07,2204.72 ; PW2.1 1555.12,1949.8 ; PW2.1@1506.89,1959.45 cw(c1506.89,1866.3) 1572.75,1932.17 ; 1713.95,2186.39 cw(c1781.5,2118.85) BUS2.2@1781.5,2214.37 ; 1732.28,2204.73 cw(c1765.02,2171.99) BUS2.2@1785.83,2213.34 ; BUS2.2 1732.28,2204.72 ; 1903.16,1682.06 cw(c1848.23,1627.13) C6.2@1925.91,1627.13 ; C6.2@1915.43,1637.61 cw(c1915.43,1559.93) 1970.36,1614.86 ; Q2.4 3336.06,1538.43 2046.79,1538.43 1803.72,1781.5 BUS1.2 1663.39,1781.5 1615.16,1829.72 1615.16,1889.76 ; 1555.12,1949.8 1615.16,1889.76 ; 1555.12,1949.8 1615.16,1949.8 ; 1615.16,1889.76 1615.16,1949.8 ; 1615.16,1949.8 1683.07,2017.72 1683.07,2155.51 ; 1683.07,2155.51 1732.28,2204.72 ; 1683.07,2155.51 1683.07,2204.72 ; 1683.07,2204.72 1732.28,2204.72 ; Q2.4@3207.66,1538.43 ccw(c3207.66,1684.47) 3310.93,1581.2 cw(c3207.66,1684.47) Q2.4@3207.66,1538.43
VCC_OUT: P0.3 Q2.3 R_K3.1 R_K5.1 | length 2489.5
  Top Layer w10: v1(3294.09,2096.46) 3294.09,2233.43 R_K5.1 ; Q2.3@3294.09,2113.36 cw(c3277.2,2113.36) 3289.14,2101.41 ccw(c3277.2,2113.36) Q2.3@3294.09,2113.36 ; Q2.3@3294.09,2113.36 ccw(c3310.99,2113.36) 3299.04,2101.41 cw(c3310.99,2113.36) Q2.3@3294.09,2113.36 ; 3294.09,2161.06 cw(c3259.02,2161.06) 3283.82,2136.26 ccw(c3259.02,2161.06) 3294.09,2161.06 ; 3294.09,2161.06 ccw(c3329.17,2161.06) 3304.37,2136.26 cw(c3329.17,2161.06) 3294.09,2161.06 ; 3294.09,2185.2 cw(c3234.88,2185.2) 3276.75,2143.33 ccw(c3234.88,2185.2) 3294.09,2185.2 ; 3294.09,2185.2 ccw(c3353.31,2185.2) 3311.44,2143.33 cw(c3353.31,2185.2) 3294.09,2185.2 ; R_K5.1@3285.06,2223.03 cw(c3263.26,2201.23) 3294.09,2201.23 ccw(c3263.26,2201.23) R_K5.1@3285.06,2223.03 ; 3294.09,2199.4 cw(c3327.51,2199.4) 3303.88,2223.03 ccw(c3327.51,2199.4) 3294.09,2199.4
  Top Layer w50: P0.3 cw(c2684.79,1639.43) 2684.79,1716.43 3087.79,1716.43 ccw(c3087.79,1779.43) 3150.79,1779.43 3150.79,2040.43 cw(c3206.82,2040.43) 3206.82,2096.46 v1(3294.09,2096.46)
  Bottom Layer w10: v1(3294.09,2096.46) 3667.82,2096.46 3696.79,2125.43 3696.79,2297.43 3741.88,2342.52 v1(3827.95,2342.52) ; 3310.99,2096.46 cw(c3310.99,2113.36) 3299.04,2101.41 ccw(c3310.99,2113.36) 3310.99,2096.46 ; 3310.99,2096.46 ccw(c3310.99,2079.56) 3299.04,2091.51 cw(c3310.99,2079.56) 3310.99,2096.46 ; 3811.05,2342.52 cw(c3811.05,2325.62) 3823,2337.57 ccw(c3811.05,2325.62) 3811.05,2342.52 ; 3811.05,2342.52 ccw(c3811.05,2359.42) 3823,2347.47 cw(c3811.05,2359.42) 3811.05,2342.52
pads on no net: C8.2 S1.0 U3.1 U3.3 U3.4 U3.6 U3.7 U3.12 U?.1 U?.7 U?.11 U?.12 U?.13 U?.15 U?.16 U?.17 U?.18 U?.19 U?.21 U?.22 U?.23 U?.24 U?.26 U?.27 U?.28 U?.29 U?.31 U?.32 U?.33 U?.35 U?.36 U?.37 U?.38 U?.40

## Polygon pours and split planes (outlines as drawn)
GND on Top Layer "top-GND" (solid, remove dead copper, pour order 4): 1353,2678 1360,2671 1360,1462 3952,1462 3952,2601 3879,2674
GND on Bottom Layer "top-GND" (solid, remove dead copper, pour order 6): 1364,2667 1353,2656 1353,1462 3938,1462 3952,1476 3952,2601 3879,2674

## Keep-outs
Keep-Out Layer:
  circle w10: c1515.75,2519.68 r52.17
  circle w10: c1515.75,1614.17 r52.17
  circle w10: c3799.21,1624.02 r52.17
  circle w10: c3799.21,2519.68 r52.17
  lines w10: 1377.95,1614.17 ccw(c1515.75,1614.17) 1515.75,1476.38 3799.21,1476.38 ccw(c3799.21,1614.17) 3937.01,1614.17 3937.01,2519.68 ccw(c3799.21,2519.68) 3799.21,2657.48 1515.75,2657.48 ccw(c1515.75,2519.68) 1377.95,2519.68 1377.95,1614.17

## Other copper
Top Layer:
  rectangle net BUS: 2121.79,2211.43 2147.79,2239.43
  region net NetC_K_1: 3580.79,2288.43 3500.79,2288.43 3486.79,2274.43 3486.79,2242.43 3488,2215 3608,2215 3608.79,2240.43
  region net VCC_IN: 1865.79,1665.43 1865.79,1594.43 1937.79,1594.43
  region net VCC_OUT: 3205.79,2071.43 cw(c3205.79,2011.07) 3248.47,2053.75 3264.79,2037.43 3264.79,2071.43
  region net VCC_OUT: 3195.79,2120.43 ccw(c3195.79,2202.51) 3253.83,2144.47 3264.79,2155.43 3264.79,2120.43
  region net VCC_IN: 3120.79,1655.43 3086.79,1655.43 3086.79,1610.43 cw(c3054.79,1610.43) 3054.79,1578.43 3120.79,1578.43
  region net VCC_IN: 3120.79,1655.43 3153.79,1655.43 3153.79,1604.43 ccw(c3179.79,1604.43) 3179.79,1578.43 3120.79,1578.43
  region net VCC_IN: 3179.79,1578.2 ccw(c3179.79,1596.2) 3197.79,1596.2 3197.79,1578.43
Bottom Layer:
  region net 5.0V: 1892.79,2296.43 1892.79,2343.43 ccw(c1865.79,2343.43) 1865.79,2370.43 1925.79,2370.43 1925.79,2296.43
  region net 5.0V: 1925.79,2296.43 1959.79,2296.43 1959.79,2341.43 cw(c1988.79,2341.43) 1988.79,2370.43 1925.79,2370.43

## Silkscreen, mask and mechanical layers (free items; w line width, h text height)
Top Overlay:
  text "D" at 3661.42,2381.89 h30
  text "G" at 3562.99,2185.04 h30
  text "S" at 3641.73,2185.04 h30

## Text inside footprints (layer, text, board x,y; h text height)
C6: Top Overlay "+" at 1991,1616 h40 r90
C7: Top Overlay "+" at 1911,2246 h40
C8: Top Overlay "+" at 3130,1704 h40 r180